# Altium PCB Therm_Expand_PCB.PcbDoc (part 1 of 2)
Units mm, origin at the board's own origin, x right, y up, seen from the top; angles counter-clockwise.
Board outline 84.45 x 65.96 mm, 2 copper layers (Top Layer, Bottom Layer); 40 components, 59 nets, 217 pads, 138 vias.
Unrouted connection lines stored in the file: 1.
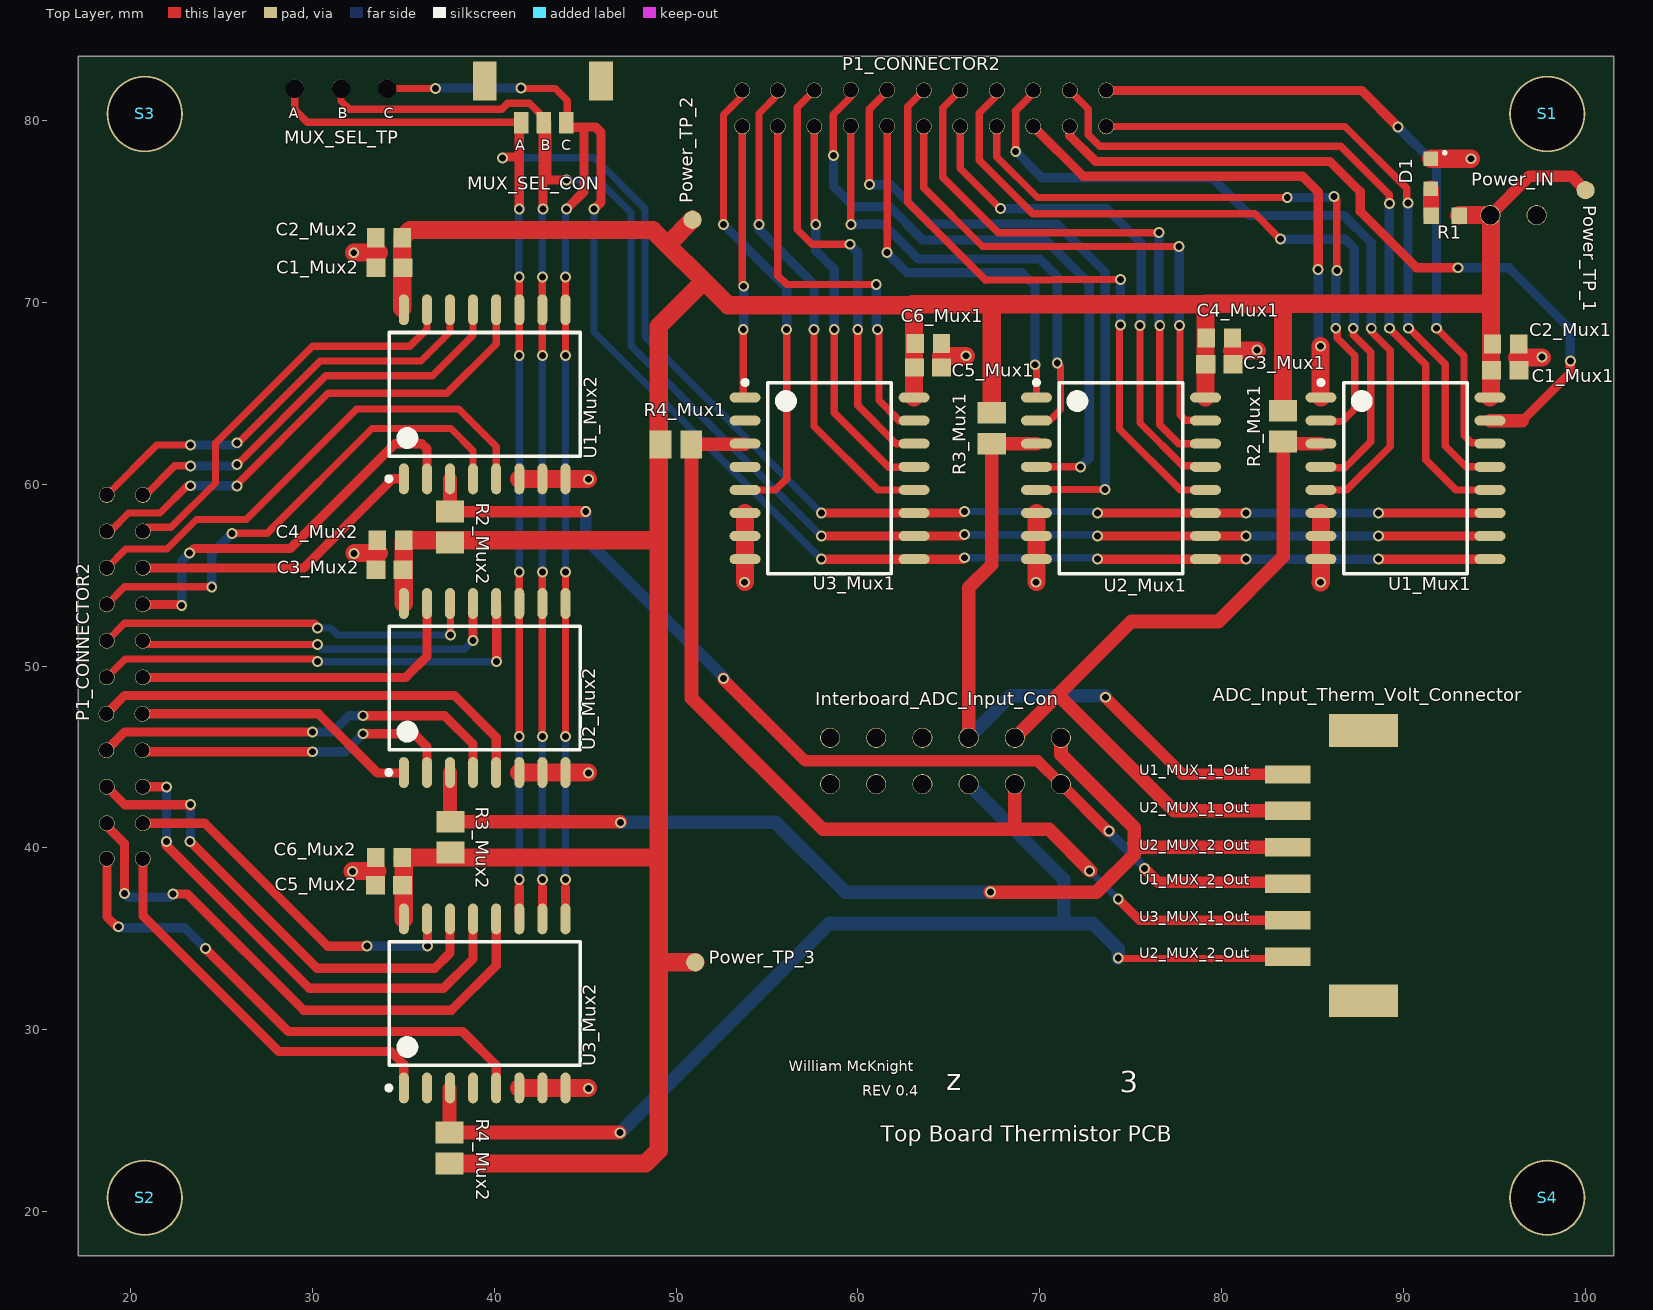
[diagram p0: Top Layer view]
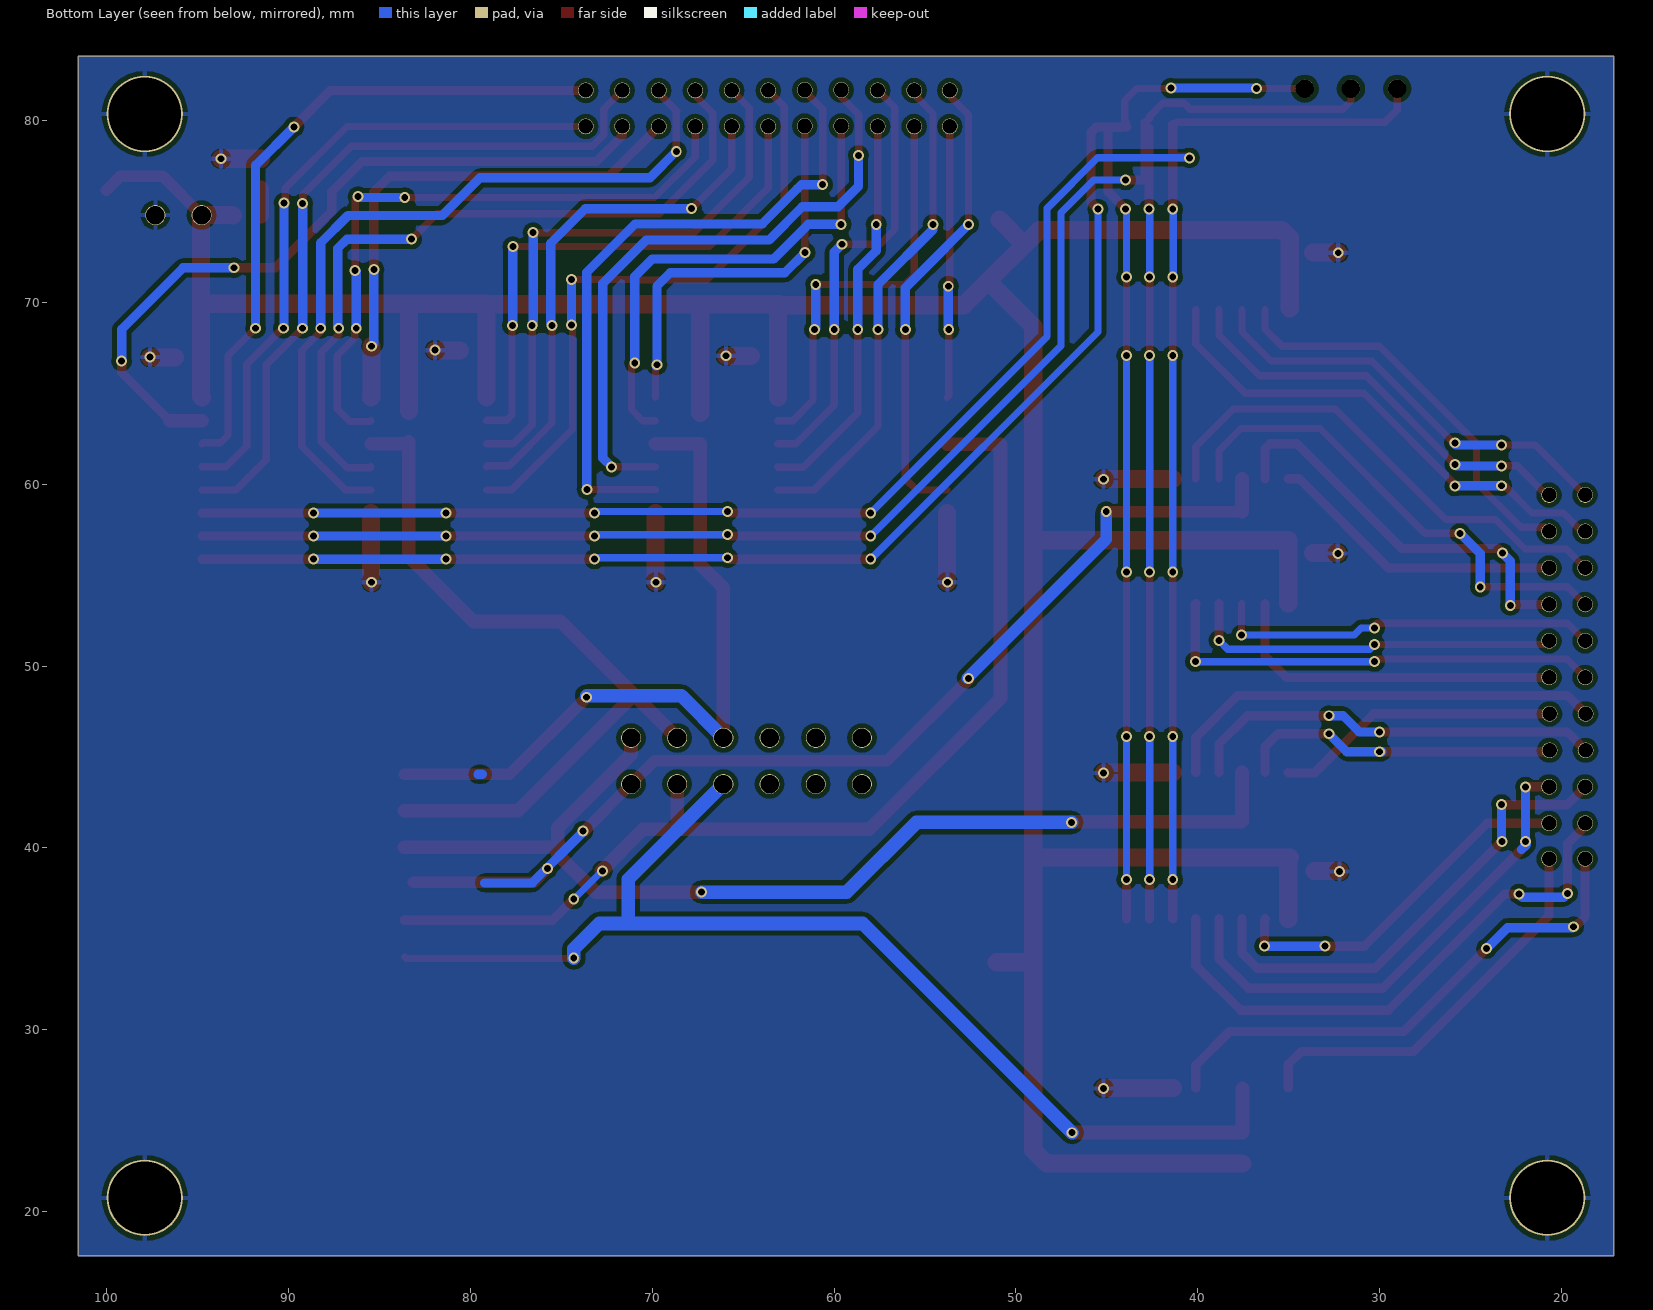
[diagram p1: Bottom Layer view, seen from below]

## Layer stack, top to bottom
Top Solder: solder mask 0.0102, Solder Resist, Dk 3.5
Top Layer: signal copper 0.0356
Dielectric 1: dielectric 0.32, FR-4, Dk 4.8
Bottom Layer: signal copper 0.0356
Bottom Solder: solder mask 0.0102, Solder Resist, Dk 3.5

## Board outline
17.12,83.541 101.575,83.541 101.575,17.577 17.12,17.577

## Design rules (kind name [scope] priority, off if disabled: settings)
Clearance [All] p1: gap=0.254 ignorepadtopadclearanceinfootprint=FALSE except(0: Arc-Hole Track-Hole SMDPad-Hole THPad-Hole Via-Hole Fill-Hole Poly-Hole Region-Hole Text-Hole; 0.127: Arc-Arc Arc-Track Arc-Via Track-Track Track-Via SMDPad-SMDPad)
HoleSize [All] p1: absolutevalues=TRUE maxlimit=6.3 minlimit=0.2 maxpercent=80.000 minpercent=20.000
MinimumAnnularRing [All] p1: minimumring=0.3
PolygonConnect [All] p1: connectstyle=Relief reliefconductorwidth=0.254 reliefentries=4 polygonreliefangle="90 Angle" airgapwidth=0.254
RoutingVias [All] p1: holewidth=0.381 width=0.65 viastyle="Through Hole" minholewidth=0.305 minwidth=0.6 maxholewidth=0.711 maxwidth=0.9
ShortCircuit [All] p1: allowed=TRUE
SolderMaskExpansion [All] p1: expansion=0.102
Width [All] p1: maxlimit=7.62 minlimit=0.127 preferedwidth=0.381 minimp=50.000000 maximp=50.000000 favimp=50.000000
28 further rules are at their usual default settings.

## Classes and differential pairs
component class U_Single_Mux2: C1_Mux2 C2_Mux2 C3_Mux2 C4_Mux2 MUX_SEL_TP R4_Mux2 U1_Mux2
component class U_Single_Mux1: C1_Mux1 C2_Mux1 C3_Mux1 C4_Mux1 Power_TP_2 Power_TP_3 R3_Mux1 R4_Mux1 U1_Mux1 U2_Mux1
component class U_AHK50H-ND_THERM_CONNECTOR2: P1_CONNECTOR2
component class U_AHK50H-ND_THERM_CONNECTOR1: P1_CONNECTOR2
component class U_Data_Conversion: D1 Interboard_ADC_Input_Con Power_IN Power_TP_1 R1 S1 S2 S4 "SPI Connector"
net class ADC_OUTA[1..2]: ADC_OUTA1 ADC_OUTA2
channel class 50Pin_Connector: Data_TransferA_U_AHK50H-ND_THERM_CONNECTOR1 Data_TransferB_U_AHK50H-ND_THERM_CONNECTOR2
channel class MID: Data_Transfer1 Data_Transfer2
channel class Multiplexers: Data_TransferA_U_Single_Mux1 Data_TransferB_U_Single_Mux2
net class ADC_OUTB[1..2]: ADC_OUTB1 ADC_OUTB2
net class ADC_OUTC[1..2]: ADC_OUTC1 ADC_OUTC2

## Components (designator, comment, footprint, x,y, rotation, side; value= is the part's Value field where it differs from the comment)
ADC_Input_Therm_Volt_Connector "6Pos_ADC_Volt_Test_Connector" 6POS_ADC_Volt_TEST 83.642,34.011 r90 top (schematic designator P4)
C1_Mux1 "0.1uF" "0.1uF Bypass Capacitor" 95.606,66.269 r180 top (schematic designator C1)
C1_Mux2 "0.1uF" "0.1uF Bypass Capacitor" 34.239,71.907 r0 top (schematic designator C1)
C2_Mux1 "1uF" 1UF_SAMSUNG 95.631,67.716 r180 top (schematic designator C2)
C2_Mux2 "1uF" 1UF_SAMSUNG 34.214,73.558 r0 top (schematic designator C2)
C3_Mux1 "0.1uF" "0.1uF Bypass Capacitor" 79.883,66.599 r180 top (schematic designator C3)
C3_Mux2 "0.1uF" "0.1uF Bypass Capacitor" 34.239,55.296 r0 top (schematic designator C3)
C4_Mux1 "1uF" 1UF_SAMSUNG 79.883,68.047 r180 top (schematic designator C4)
C4_Mux2 "1uF" 1UF_SAMSUNG 34.29,56.921 r0 top (schematic designator C4)
C5_Mux1 "0.1uF" "0.1uF Bypass Capacitor" 63.856,66.421 r180 top (schematic designator C5)
C5_Mux2 "0.1uF" "0.1uF Bypass Capacitor" 34.214,37.948 r0 top (schematic designator C5)
C6_Mux1 "1uF" 1UF_SAMSUNG 63.881,67.742 r180 top (schematic designator C6)
C6_Mux2 "1uF" 1UF_SAMSUNG 34.214,39.472 r0 top (schematic designator C6)
D1 "LED" Green_SMD_LED 93.142,86.69 r270 top
Interboard_ADC_Input_Con "12 POS ADC Header" "12 POS Dual Header" 58.471,43.51 r0 top (schematic designator P2)
MUX_SEL_CON "3_POS_MEX_SEL" 3POS_MUX_SEL 43.967,79.883 r180 top (schematic designator P6)
MUX_SEL_TP "3 POS Mux Select Header" "Mux Select 3 Pos Header Pin" 34.112,81.763 r180 top (schematic designator P5)
P1_CONNECTOR2 "22-Pin-Connector" "22-PIN CONENCTOR" 363.169,390.042 r90 top (schematic designator P1)
P1_CONNECTOR2 "22-Pin-Connector" "22-PIN CONENCTOR" 404.292,-262.814 r0 top (schematic designator P1)
Power_IN "2 Pos Power Header without 3D body" "2 Pos Power Header - duplicate" 94.793,74.803 r0 top (schematic designator P3)
Power_TP_1 "Test Point" "Test Point" 100.025,76.175 r90 top (schematic designator TP1)
Power_TP_2 "Test Point" "Test Point" 50.902,74.549 r90 top (schematic designator TP2)
Power_TP_3 "Test Point" "Test Point" 51.054,33.706 r90 top (schematic designator TP4)
R1 "Green" Green_LED_Resistor_90.9 92.304,74.778 r0 top
R2_Mux1 "6.49kOhm SMD Resistor" RESC2012X06N 83.388,63.195 r90 top (schematic designator R2)
R2_Mux2 "6.49kOhm SMD Resistor" RESC2012X06N 37.567,57.646 r270 top (schematic designator R2)
R3_Mux1 "6.49kOhm SMD Resistor" RESC2012X06N 67.361,63.082 r90 top (schematic designator R3)
R3_Mux2 "6.49kOhm SMD Resistor" RESC2012X06N 37.592,40.589 r270 top (schematic designator R3)
R4_Mux1 "6.49kOhm SMD Resistor" RESC2012X06N 49.987,62.179 r180 top (schematic designator R4)
R4_Mux2 "6.49kOhm SMD Resistor" RESC2012X06N 37.541,23.495 r270 top (schematic designator R4)
S1 "#6-32 Standoff" "#6-32 Stand Off"#1 108.179,111.023 r0 top
S2 "#6-32 Standoff" "#6-32 Stand Off"#2 31.039,51.41 r0 top
S3 "#6-32 Standoff" "#6-32 Stand Off"#3 31.039,111.023 r0 top
S4 "#6-32 Standoff" "#6-32 Stand Off"#4 108.179,51.41 r0 top
U1_Mux1 "8:1 - MUX" "8x1 16SOIC MUX" 90.119,60.325 r0 top (schematic designator U1)
U1_Mux2 "8:1 - MUX" "8x1 16SOIC MUX" 39.472,64.948 r90 top (schematic designator U1)
U2_Mux1 "8:1 - MUX" "8x1 16SOIC MUX" 74.473,60.325 r0 top (schematic designator U2)
U2_Mux2 "8:1 - MUX" "8x1 16SOIC MUX" 39.472,48.793 r90 top (schematic designator U2)
U3_Mux1 "8:1 - MUX" "8x1 16SOIC MUX" 58.445,60.325 r0 top (schematic designator U3)
U3_Mux2 "8:1 - MUX" "8x1 16SOIC MUX" 39.472,31.445 r90 top (schematic designator U3)

## Footprints (in the part's own frame and the unit in brackets; to place one, negate y for a bottom-side part, rotate by r counter-clockwise, add the part's x,y. Pads: shape width x height; smd on the part's side, far side on the other; paste and mask are expansions set on the pad)
"0.1uF Bypass Capacitor" [mm] "Chip Capacitor, 2-Leads, Body 1.60x0.80mm, IPC Medium Density"
  rect 1.05x1 smd: 1(-0.75,0) 2(0.75,0)
  body extent -0.87,-0.48 0.87,0.48, height 0.9
1UF_SAMSUNG [mm]
  rect 0.95x1.05 smd: 1(-0.725,0) 2(0.725,0)
  body extent -0.85,-0.45 0.85,0.45, height 0.9
"2 Pos Power Header - duplicate" [mm] "Without 3D body,"
  round 1.1 hole 1.02: 1(0,0) 2(2.54,0)
3POS_MUX_SEL [mm] "CONN HEADER SMD R/A 3POS 1.25MM"
  rect 0.8x1.2 smd: 1(0,0) 2(1.245,0) 3(2.489,0)
  rect 1.3x2.15 smd: 4(-1.905,-2.286) 5(4.496,-2.286)
  body extent -2.28,-3.84 4.72,0.36, height 3.91
6POS_ADC_Volt_TEST [mm] "CONN HEADER SMD R/A 6POS 2MM"
  rect 1x2.5 smd: 1(0,0) 2(2.007,0) 3(4.013,0) 4(6.02,0) 5(8.026,0) 6(10.033,0)
  rect 1.8x3.8 smd: 7(-2.413,-4.166) 8(12.446,-4.166)
"8x1 16SOIC MUX" [mm] "IC MUX/DEMUX 8X1 16SOIC"
  oval 1.7x0.55 smd: 1(-4.65,4.445) 2(-4.65,3.175) 3(-4.65,1.905) 4(-4.65,0.635) 5(-4.65,-0.635) 6(-4.65,-1.905) 7(-4.65,-3.175) 8(-4.65,-4.445) 9(4.65,-4.445) 10(4.65,-3.175) 11(4.65,-1.905) 12(4.65,-0.635) 13(4.65,0.635) 14(4.65,1.905) 15(4.65,3.175) 16(4.65,4.445)
  silkscreen extent -4.77,-5.25 3.4,5.39, body extent -5.15,-5.25 5.15,5.25, height 2.65
"12 POS Dual Header" [mm] "Board to Board ADC Channel Header"
  round 1.1 hole 1.02: 1(0,0) 2(0,2.54) 3(2.54,2.54) 4(2.54,0) 5(5.08,0) 6(5.08,2.54) 7(7.62,2.54) 8(7.62,0) 9(10.16,0) 10(10.16,2.54) 11(12.7,2.54) 12(12.7,0)
  body extent -1.27,-3.18 13.97,4.7, height 20.46
"22-PIN CONENCTOR" [mil]
  round 34 hole 31.5: 1(-13017,13484) 2(-13017,13562) 3(-13096,13484) 4(-13096,13562) 5(-13175,13484) 6(-13175,13562) 7(-13254,13484) 8(-13254,13562) 9(-13333,13484) 10(-13333,13562) 11(-13412,13484) 12(-13412,13562) 13(-13491,13485) 14(-13491,13563) 15(-13570,13485) 16(-13570,13563) 17(-13649,13484) 18(-13649,13562) 19(-13728,13484) 20(-13728,13562) 21(-13805,13484) 22(-13805,13562)
  body extent -13883,13472 -12939,13866, height 199
"#6-32 Stand Off"#1 [mm]
  round 4.2 hole 4: S1(-10.262,-30.658)
  body extent -13.92,-33.83 -6.6,-27.48, height 10.32
"#6-32 Stand Off"#2 [mm]
  round 4.2 hole 4: S3(-10.262,-30.658)
  body extent -13.92,-33.83 -6.6,-27.48, height 10.32
"#6-32 Stand Off"#3 [mm]
  round 4.2 hole 4: S2(-10.262,-30.658)
  body extent -13.92,-33.83 -6.6,-27.48, height 10.32
"#6-32 Stand Off"#4 [mm]
  round 4.2 hole 4: S4(-10.262,-30.658)
  body extent -13.92,-33.83 -6.6,-27.48, height 10.32
Green_LED_Resistor_90.9 [mm]
  rect 0.85x0.9 smd: 1(-0.775,0) 2(0.775,0)
  body extent -0.85,-0.45 0.85,0.45, height 0.55
Green_SMD_LED [mm]
  rect 0.8x0.8 smd: 1(8.788,-1.626) 2(10.439,-1.626)
  silkscreen extent 8.43,-0.89 8.48,-0.84, body extent 8.79,-2.02 10.41,-1.23, height 0.71
"Mux Select 3 Pos Header Pin" [mm]
  round 1 hole 1.02: 1(0,0) 2(2.54,0) 3(5.08,0)
  body extent -1.19,-7.26 6.43,1.24, height 5.77
RESC2012X06N [mm] "Chip Resistor, 2-Leads, Body 2.00x1.25mm, IPC Medium Density"
  rect 1.2x1.55 smd: 1(-0.85,0) 2(0.85,0)
  body extent -1.1,-0.58 1.1,0.58, height 0.6
"Test Point" [mm]
  round 1 smd: 1(0,0)

## Part data
ADC_Input_Therm_Volt_Connector: "Connector Header Surface Mount, Right Angle 6 position 0.079\" (2.00mm)", Manufacturer=Molex, Manufacturer Part Number=5055780671, Supplier Part Number 1=WM17945CT-ND, Pricing 1="1=1.02000, 10=0.89300, 100=0.77050 (USD)", RoHS=No, Stock 1=3435, Supplier 1=Digi-Key
C1_Mux1 C1_Mux2 C3_Mux1 C3_Mux2 C5_Mux1 C5_Mux2: library part "0.1uF Cap", "0.1uF Bypass Cap", Case/Package=0603, Case Code (Metric)=1608, Dielectric=X7R, Dielectric Material=Ceramic, Manufacturer=KEMET, Manufacturer Part Number=C0603C104K9RACTU, Max Operating Temperature=125°C, Min Operating Temperature=-55°C, Package Quantity=4000, Supplier Part Number 1=399-15351-1-ND, Tolerance=10%, Voltage Rating=6.3V, Case Code (Imperial)=0603, ComponentLink1Description=https://datasheet.ciiva.com/13371/kem-c1002-x7r-smd-357932-13371879.pdf?src-supplier=Mouser, ComponentLink1URL=https://datasheet.ciiva.com/13371/kem-c1002-x7r-smd-357932-13371879.pdf?src-supplier=Mouser, Dissipation Factor=5%, Height=0.8mm, Length=1.6mm, Mount="Surface Mount", Packaging="Tape and Reel", Pricing 1="1=0.19000, 10=0.13800, 100=0.06480, 500=0.04546, 1000=0.03763 (USD)", RoHS=Yes, Stock 1=758, Supplier 1=Digi-Key, Termination=SMD/SMT, Thickness=0.034inch, Voltage Rating (DC)=6.3V, Width=0.8mm
C2_Mux1 C2_Mux2 C4_Mux1 C4_Mux2 C6_Mux1 C6_Mux2: library part "1uF Samsung Cap", "1uF Samsung Cap", Case/Package=0603, Case Code (Metric)=1608, Dielectric=X7R, Manufacturer=Samsung, Manufacturer Part Number=CL10B105KP8NNNC, Max Operating Temperature=125°C, Min Operating Temperature=-55°C, Package Quantity=1, Supplier Part Number 1=1276-1946-1-ND, Tolerance=10%, Voltage Rating=10V, Capacitance=1uF, Case Code (Imperial)=0603, ComponentLink1Description=https://media.digikey.com/pdf/Data%20Sheets/Samsung%20PDFs/CL_Series_MLCC_ds.pdf?src-supplier=Digi-Key, ComponentLink1URL=https://media.digikey.com/pdf/Data%20Sheets/Samsung%20PDFs/CL_Series_MLCC_ds.pdf?src-supplier=Digi-Key, ComponentLink2Description=http://www1.futureelectronics.com/doc/SAMSUNG/CL10B105KP8NNNC.pdf?src-supplier=Future+Electronics, ComponentLink2URL=http://www1.futureelectronics.com/doc/SAMSUNG/CL10B105KP8NNNC.pdf?src-supplier=Future+Electronics, ComponentLink3Description=https://www.verical.com/server-webapp/html/getDatasheet?partID=358410&src-supplier=Verical, ComponentLink3URL=https://www.verical.com/server-webapp/html/getDatasheet?partID=358410&src-supplier=Verical, Contact Plating=Tin, Depth=0.8mm, Height=0.8mm, Lead Free="Lead Free", Length=1.6mm, Mount="Surface Mount", Packaging="Tape and Reel", Pricing 1="1=0.1, 10=0.052, 100=0.0233, 500=0.0166, 1000=0.0131 (USD)", Radiation Hardening=No, Stock 1=10781730, Supplier 1=Digi-Key, Thickness=0.035inch, Voltage Rating (DC)=10V, Width=0.031inch
D1: library part GREEN_LED, Case/Package=0603, Case Code (Metric)=1608, Color=Green, Forward Current=20mA, Forward Voltage=2V, Lens Color=Colorless,Clear, Manufacturer=Dialight, Manufacturer Part Number=5988070107F, Max Operating Temperature=100°C, Min Operating Temperature=-30°C, Package Quantity=4000, Power Dissipation=60mW, Reverse Voltage=5V, Supplier Part Number 1=350-2035-1-ND, Case Code (Imperial)=0603, ComponentLink1Description=http://www.mouser.com/ds/2/109/SMT_selector_guide-267443.pdf?src-supplier=Mouser, ComponentLink1URL=http://www.mouser.com/ds/2/109/SMT_selector_guide-267443.pdf?src-supplier=Mouser, ComponentLink2Description=http://uk.rs-online.com/webdocs/0ae2/0900766b80ae2975.pdf?src-supplier=RSComponents, ComponentLink2URL=http://uk.rs-online.com/webdocs/0ae2/0900766b80ae2975.pdf?src-supplier=RSComponents, ComponentLink3Description=http://www.farnell.com/datasheets/1720200.pdf?src-supplier=Element14, ComponentLink3URL=http://www.farnell.com/datasheets/1720200.pdf?src-supplier=Element14, ComponentLink4Description=https://media.digikey.com/pdf/Data%20Sheets/Dialight%20PDFs/598_Series_0603_Pkg.pdf?src-supplier=Digi-Key, ComponentLink4URL=https://media.digikey.com/pdf/Data%20Sheets/Dialight%20PDFs/598_Series_0603_Pkg.pdf?src-supplier=Digi-Key, ComponentLink5Description=http://www.farnell.com/datasheets/1484480.pdf?src-supplier=Element14, ComponentLink5URL=http://www.farnell.com/datasheets/1484480.pdf?src-supplier=Element14, ComponentLink6Description=https://www.alliedelec.com/m/d/745256ca487aea7b70ea31e2d673d5bb.pdf?src-supplier=Allied+Electronics, ComponentLink6URL=https://www.alliedelec.com/m/d/745256ca487aea7b70ea31e2d673d5bb.pdf?src-supplier=Allied+Electronics, ComponentLink7Description=http://www.onlinecomponents.com/productFiles/mf-DIA/mdei5980603.pdf?src-supplier=Onlinecomponents.com, ComponentLink7URL=http://www.onlinecomponents.com/productFiles/mf-DIA/mdei5980603.pdf?src-supplier=Onlinecomponents.com, ComponentLink8Description=https://www.verical.com/server-webapp/html/getDatasheet?partID=146438&src-supplier=Verical, ComponentLink8URL=https://www.verical.com/server-webapp/html/getDatasheet?partID=146438&src-supplier=Verical, ComponentLink9Description=http://www.dialight.com/Assets/Brochures_And_Catalogs/Indication/SMT_selector_guide.pdf?src-supplier=Future+Electronics, ComponentLink9URL=http://www.dialight.com/Assets/Brochures_And_Catalogs/Indication/SMT_selector_guide.pdf?src-supplier=Future+Electronics, Depth=0.8mm, Dominant Wavelength=568nm, Height=0.7mm, Illumination Color=Green, Lead Free="Lead Free", Length=1.6mm, Lens Size=0.8mm, Lens Style=Flat,Rectangular,Diffused,Colorless,Clear, Lens Transparency=Clear, Luminous Intensity=20mcd, Mount="Surface Mount", Number of Elements=1, Number of LEDs=1, Number of Pins=2, Packaging="Tape and Reel", Pricing 1="1=0.46, 10=0.33, 25=0.2528, 100=0.1648, 250=0.1209, 500=0.1026, 1000=0.0843 (USD)", Radiation Hardening=No, REACH SVHC="No SVHC", Stock 1=228546, Supplier 1=Digi-Key, Test Current=20mA, Viewing Angle=140°, Wavelength=570nm, Width=0.8mm
Interboard_ADC_Input_Con: "Interboard connector for thermistors connecting to ADC", Color=Black, Manufacturer=3M, Manufacturer Part Number=929715-06-06-EU, Package Quantity=500, Supplier Part Number 1=3M156375-12-ND, ComponentLink1Description=http://www.mouser.com/ds/2/1/ts0769-35914.pdf?src-supplier=Mouser, ComponentLink1URL=http://www.mouser.com/ds/2/1/ts0769-35914.pdf?src-supplier=Mouser, ComponentLink2Description=http://components.arrow.com/part/dataview/42715320S8912076N3321?src-supplier=Arrow, ComponentLink2URL=http://components.arrow.com/part/dataview/42715320S8912076N3321?src-supplier=Arrow, ComponentLink3Description=http://multimedia.3m.com/mws/mediawebserver?66666UuZjcFSLXTtmXME5x46EVuQEcuZgVs6EVs6E666666--?src-supplier=Digi-Key, ComponentLink3URL=http://multimedia.3m.com/mws/mediawebserver?66666UuZjcFSLXTtmXME5x46EVuQEcuZgVs6EVs6E666666--?src-supplier=Digi-Key, Connector Type="Male Pin", Contact Mating Length=0.318inch, Contact Plating=Gold, Gender=Male, Mount="Through Hole", Number of Positions=12, Number of Rows=2, Packaging=Bulk, Pitch=0.1inch, Pricing 1="1=1.86000, 10=1.69000, 25=1.58600, 50=1.51720, 100=1.44820, 250=1.31024, 500=1.20680 (USD)", RoHS=Yes, Row Spacing=0.1inch, Stock 1=0, Supplier 1=Digi-Key, Termination=Solder
MUX_SEL_CON: "Connector Header Surface Mount, Right Angle 3 position 0.049\" (1.25mm)", Flammability Rating="UL94 V-0", Insulation Color=Black, Manufacturer=Molex, Manufacturer Part Number=505567-0371, Max Operating Temperature=105°C, Min Operating Temperature=-40°C, Supplier Part Number 1=WM17039CT-ND, ComponentLink1Description=https://www.molex.com/pdm_docs/sd/5055670371_sd.pdf?src-supplier=Digi-Key, ComponentLink1URL=https://www.molex.com/pdm_docs/sd/5055670371_sd.pdf?src-supplier=Digi-Key, ComponentLink2Description=http://www.farnell.com/datasheets/2551041.pdf?src-supplier=Newark, ComponentLink2URL=http://www.farnell.com/datasheets/2551041.pdf?src-supplier=Newark, Connector Type="Header,Male Pin", Contact Material=Brass, Contact Plating=Tin, Contact Shape=Square, Fastening Type=Ramp, Insulation Material=Nylon, Mount="Surface Mount", Number of Positions=3, Number of Rows=1, Packaging="Cut Tape", Pricing 1="1=0.84000, 10=0.74100, 100=0.63940, 500=0.52312 (USD)", RoHS=No, Stock 1=2041, Supplier 1=Digi-Key, Termination=Solder
MUX_SEL_TP: "Mux Sel Header TP", Manufacturer="Adam Equipment", Manufacturer Part Number=PH1RA-03-UA, Supplier Part Number 1=2057-PH1RA-03-UA-ND, ComponentLink1Description=https://datasheet.ciiva.com/16476/page-292-295-16476086.pdf?src-supplier=Future+Electronics, ComponentLink1URL=https://datasheet.ciiva.com/16476/page-292-295-16476086.pdf?src-supplier=Future+Electronics, Lead Free="Lead Free", Pricing 1="1=0.12000, 10=0.11300, 100=0.06960, 500=0.05760, 1000=0.05040, 5000=0.04320, 10000=0.04200 (USD)", RoHS=Yes, Stock 1=4630, Supplier 1=Digi-Key
P1_CONNECTOR2 P1_CONNECTOR2: Color=Black, Contact Resistance=30mR, Current Rating=2A, Manufacturer=Hirose, Manufacturer Part Number=DF11-22DP-2DS(24), Max Operating Temperature=85°C, Min Operating Temperature=-30°C, Package Quantity=20, Supplier Part Number 1=H10253-ND, Voltage Rating=250V, ComponentLink1Description=http://docs-usa.electrocomponents.com/techlib:/itc_doclist_US.htm?stockno=6888963&src-supplier=Allied+Electronics, ComponentLink1URL=http://docs-usa.electrocomponents.com/techlib:/itc_doclist_US.htm?stockno=6888963&src-supplier=Allied+Electronics, ComponentLink2Description=https://www.verical.com/server-webapp/html/getDatasheet?partID=456315&src-supplier=Verical, ComponentLink2URL=https://www.verical.com/server-webapp/html/getDatasheet?partID=456315&src-supplier=Verical, ComponentLink3Description=http://www.hirose.co.jp/cataloge_hp/en_DF11_20130411.pdf?src-supplier=Future+Electronics, ComponentLink3URL=http://www.hirose.co.jp/cataloge_hp/en_DF11_20130411.pdf?src-supplier=Future+Electronics, ComponentLink4Description=http://www.farnell.com/datasheets/91550.pdf?src-supplier=Element14, ComponentLink4URL=http://www.farnell.com/datasheets/91550.pdf?src-supplier=Element14, ComponentLink5Description=http://www.mouser.com/ds/2/185/DF11_catalog-1064296.pdf?src-supplier=Mouser, ComponentLink5URL=http://www.mouser.com/ds/2/185/DF11_catalog-1064296.pdf?src-supplier=Mouser, ComponentLink6Description=http://documents.rs-components.com/techlib://itc_doclist_GB.htm?stockno=6056598&src-supplier=RSComponents, ComponentLink6URL=http://documents.rs-components.com/techlib://itc_doclist_GB.htm?stockno=6056598&src-supplier=RSComponents, Connector Type="Male Pin", Contact Material="Brass,Copper Alloy,Tin", Contact Mating Length=0.118inch, Contact Plating=Tin, Depth=10mm, Fastening Type=Detent, Gender=Male, Height=5mm, Housing Color=Black, Housing Material=Polyamide, Lead Free="Lead Free", Length=24mm, Max Current Rating=2A, Mount="Through Hole", Number of Contacts=22, Number of Positions=22, Number of Rows=2, Orientation="Right Angle", Packaging=Rail/Tube, Pitch=2mm, Pricing 1="1=1.19, 20=1.0455, 100=0.902, 500=0.738, 1000=0.656 (USD)", Radiation Hardening=No, Row Spacing=0.079inch, Stock 1=536, Supplier 1=Digi-Key, System=Connector, Termination=Solder
Power_IN: "No supplier part for this schematic symbol, only here to create board to board holes for the power header"
R1: library part Green_LED_Res, Case/Package=0201, Case Code (Metric)=0603, Manufacturer=Panasonic, Manufacturer Part Number=ERJ-1GNF90R9C, Max Operating Temperature=125°C, Max Power Dissipation=50mW, Min Operating Temperature=-55°C, Package Quantity=15000, Resistance=90.9R, Supplier Part Number 1=311-90.9HRCT-ND, Temperature Coefficient=200ppm/°C, Tolerance=1%, Voltage Rating=25V, Voltage Rating (DC)=50V, Case Code (Imperial)=0201, ComponentLink1Description=https://datasheet.ciiva.com/15189/getdatasheetpartid-326528-15189836.pdf?src-supplier=Verical, ComponentLink1URL=https://datasheet.ciiva.com/15189/getdatasheetpartid-326528-15189836.pdf?src-supplier=Verical, ComponentLink2Description=https://datasheet.ciiva.com/12558/rc0603-272842-12558285.pdf?src-supplier=Mouser, ComponentLink2URL=https://datasheet.ciiva.com/12558/rc0603-272842-12558285.pdf?src-supplier=Mouser, Composition="Thick Film", Contact Plating=Tin,Matte, Depth=0.8mm, Height=0.01inch, Lead Free="Lead Free", Length=0.024inch, Military Standard=Not, Mount="Surface Mount", Number of Terminations=2, Packaging="Tape and Reel", Power Rating=50mW, Pricing 1="1=0.10000, 10=0.02400, 100=0.00970, 1000=0.00437, 2500=0.00379 (USD)", Radiation Hardening=No, RoHS=Yes, Stock 1=401780, Supplier 1=Digi-Key, Termination=SMD/SMT, Width=0.3mm
R2_Mux1 R2_Mux2 R3_Mux1 R3_Mux2 R4_Mux1 R4_Mux2: Case/Package=0805, Case Code (Metric)=2012, Manufacturer=Panasonic, Manufacturer Part Number=ERA6AEB6491V, Max Operating Temperature=155°C, Max Power Dissipation=125mW, Min Operating Temperature=-55°C, Package Quantity=1, Resistance=6.49K, Supplier Part Number 1=P6.49KDACT-ND, Temperature Coefficient=25ppm/°C, Tolerance=0.1%, Voltage Rating=100V, Case Code (Imperial)=0805, ComponentLink1Description=http://www.farnell.com/datasheets/485442.pdf?src-supplier=Farnell, ComponentLink1URL=http://www.farnell.com/datasheets/485442.pdf?src-supplier=Farnell, ComponentLink2Description=http://www.mouser.com/ds/2/315/AOA0000CE26-32660.pdf?src-supplier=Mouser, ComponentLink2URL=http://www.mouser.com/ds/2/315/AOA0000CE26-32660.pdf?src-supplier=Mouser, ComponentLink3Description=http://www.farnell.com/datasheets/2059650.pdf?src-supplier=Farnell, ComponentLink3URL=http://www.farnell.com/datasheets/2059650.pdf?src-supplier=Farnell, ComponentLink4Description=http://uk.rs-online.com/webdocs/0eb1/0900766b80eb1d8c.pdf?src-supplier=RSComponents, ComponentLink4URL=http://uk.rs-online.com/webdocs/0eb1/0900766b80eb1d8c.pdf?src-supplier=RSComponents, ComponentLink5Description=http://www.farnell.com/datasheets/485442.pdf?src-supplier=Element14, ComponentLink5URL=http://www.farnell.com/datasheets/485442.pdf?src-supplier=Element14, ComponentLink6Description=http://www.produktinfo.conrad.com/datenblaetter/1100000-1199999/001181295-da-01-en-WIDERSTAND_ERA_0805_6K49_0_1__5000ST.pdf?src-supplier=Conrad, ComponentLink6URL=http://www.produktinfo.conrad.com/datenblaetter/1100000-1199999/001181295-da-01-en-WIDERSTAND_ERA_0805_6K49_0_1__5000ST.pdf?src-supplier=Conrad, Composition="Thin Film,Metal Film", Contact Plating=Tin, Depth=1.25mm, Features="Automotive AEC-Q200", Height=0.5mm, Lead Free="Lead Free", Length=2mm, Military Standard=Not, Mount="Surface Mount", Number of Pins=2, Number of Terminations=2, Packaging="Tape and Reel", Power Rating=125mW, Pricing 1="1=0.36, 10=0.302, 100=0.1182, 1000=0.0495, 2500=0.0454 (USD)", Radiation Hardening=No, REACH SVHC="No SVHC", Stock 1=15147, Supplier 1=Digi-Key, Termination=SMD/SMT, Voltage Rating (DC)=100V, Width=1.25mm
S1 S2 S3 S4: "Hex Standoff for Thermistor Boards", Manufacturer=RAF, Manufacturer Part Number=2102T-632-AL-7, Package Quantity=100, Supplier Part Number 1=1772-1144-ND, Pricing 1="1=0.5, 25=0.3328, 100=0.2834, 250=0.2692, 500=0.2551, 1000=0.2409 (USD)", Stock 1=1687, Supplier 1=Digi-Key
U1_Mux1 U1_Mux2 U2_Mux1 U2_Mux2 U3_Mux1 U3_Mux2: "Current Therm 8:1 Mux", Case/Package=TSSOP, High Level Output Current=25mA, Manufacturer="Texas Instruments", Manufacturer Part Number=SN74LV4051ATPWRQ1, Max Operating Temperature=105°C, Max Supply Voltage=5.5V, Min Operating Temperature=-40°C, Min Supply Voltage=2V, On-State Resistance=75R, Operating Supply Current=20uA, Package Quantity=1, Supplier Part Number 1=296-37427-1-ND, -3db Bandwidth=35MHz, Bandwidth=35MHz, ComponentLink1Description=http://www.ti.com/lit/ds/symlink/sn74lv4051a-q1.pdf?src-supplier=Digi-Key, ComponentLink1URL=http://www.ti.com/lit/ds/symlink/sn74lv4051a-q1.pdf?src-supplier=Digi-Key, ComponentLink2Description=http://www.ti.com/lit/gpn/sn74lv4051a-q1?src-supplier=Mouser, ComponentLink2URL=http://www.ti.com/lit/gpn/sn74lv4051a-q1?src-supplier=Mouser, ComponentLink3Description=https://www.verical.com/server-webapp/html/getDatasheet?partID=137249&src-supplier=Verical, ComponentLink3URL=https://www.verical.com/server-webapp/html/getDatasheet?partID=137249&src-supplier=Verical, ComponentLink4Description=http://focus.ti.com/lit/ds/symlink/sn74lv4051a-q1.pdf?src-supplier=Avnet, ComponentLink4URL=http://focus.ti.com/lit/ds/symlink/sn74lv4051a-q1.pdf?src-supplier=Avnet, ComponentLink5Description=http://www.produktinfo.conrad.com/datenblaetter/1100000-1199999/001187277-da-01-en-IC_MUX_DE_SN74LV4051ATPWRQ1_TSSOP_16_TID.pdf?src-supplier=Conrad, ComponentLink5URL=http://www.produktinfo.conrad.com/datenblaetter/1100000-1199999/001187277-da-01-en-IC_MUX_DE_SN74LV4051ATPWRQ1_TSSOP_16_TID.pdf?src-supplier=Conrad, ComponentLink6Description=https://datasheet.ciiva.com/15127/getdatasheetpartid-348177-15127781.pdf?src-supplier=Verical, ComponentLink6URL=https://datasheet.ciiva.com/15127/getdatasheetpartid-348177-15127781.pdf?src-supplier=Verical, ComponentLink7Description=https://datasheet.ciiva.com/14435/sn74lv4051a-q1-14435640.pdf?src-supplier=Avnet, ComponentLink7URL=https://datasheet.ciiva.com/14435/sn74lv4051a-q1-14435640.pdf?src-supplier=Avnet, ComponentLink8Description=https://datasheet.ciiva.com/29645/sn74lv4051a-q1-29645693.pdf?src-supplier=Digi-Key, ComponentLink8URL=https://datasheet.ciiva.com/29645/sn74lv4051a-q1-29645693.pdf?src-supplier=Digi-Key, ComponentLink9Description=https://datasheet.ciiva.com/29645/sn74lv4051a-q1-29645694.pdf?src-supplier=Digi-Key, ComponentLink9URL=https://datasheet.ciiva.com/29645/sn74lv4051a-q1-29645694.pdf?src-supplier=Digi-Key, ComponentLink10Description=https://datasheet.ciiva.com/29645/sn74lv4051a-q1-29645695.pdf?src-supplier=Digi-Key, ComponentLink10URL=https://datasheet.ciiva.com/29645/sn74lv4051a-q1-29645695.pdf?src-supplier=Digi-Key, Contact Plating=Gold, Lead Free="Lead Free", Logic Function=Multiplexer,Demultiplexer, Low Level Output Current=25mA, Mount="Surface Mount", Number of Bits=8, Number of Channels=1, Number of Circuits=1, Number of Inputs=8, Number of Outputs=1, Number of Pins=16, Packaging="Tape and Reel", Pricing 1="1=0.72000, 10=0.63600, 100=0.48730, 500=0.38522, 1000=0.30818 (USD)", Propagation Delay=7ns, Radiation Hardening=No, REACH SVHC="No SVHC", RoHS=Yes, Stock 1=2492, Supplier 1=Digi-Key, Supply Type=Single, Turn-Off Delay Time=20ns, Turn-On Delay Time=20ns, Weight=0.002169oz

## Via types
v1: diameter 0.6, hole 0.381, Top Layer to Bottom Layer, tented top, 138 vias

## Nets (pads, with @x,y where several pads share a name; then routed paths per layer and width w, separated by ;. In a path a pad name is that pad's centre, name@x,y a point inside that pad or via, vN(x,y) a via of type N, cw(c..) or ccw(c..) an arc to the next point about the centre after c; other vN are vias at no path point)
+3.3V_AN: C1_Mux1.2 C1_Mux2.2 C2_Mux1.2 C2_Mux2.2 C3_Mux1.2 C3_Mux2.2 C4_Mux1.2 C4_Mux2.2 C5_Mux1.2 C5_Mux2.2 C6_Mux1.2 C6_Mux2.2 Power_IN.1 Power_TP_1.1 Power_TP_2.1 Power_TP_3.1 R1.2 R2_Mux1.2 R2_Mux2.2 R3_Mux1.2 R3_Mux2.2 R4_Mux1.2 R4_Mux2.2 U1_Mux1.16 U1_Mux2.16 U2_Mux1.16 U2_Mux2.16 U3_Mux1.16 U3_Mux2.16 | length 205.6
  Top Layer w0.635: Power_IN.1 96.926,76.937 99.263,76.937 Power_TP_1.1
  Top Layer w1: U1_Mux2.16@34.939,69.686 C2_Mux2.2 35.371,73.99 48.717,73.99 49.479,73.228 ; U3_Mux2.16 35.027,39.384 C6_Mux2.2 49.047,39.472 ; U2_Mux2.16 35.027,56.91 C4_Mux2.2 49.047,56.921 ; R4_Mux2.2 48.324,22.645 49.047,23.368 49.047,33.553 ; Power_TP_2.1 49.581,73.228 49.479,73.228 ; Power_TP_3.1 49.2,33.706 49.047,33.553 ; U3_Mux1.16 63.095,69.721 62.967,69.85 ; R3_Mux1.2 67.361,69.826 67.285,69.903 ; U2_Mux1.16 79.123,68.047 79.123,69.903 ; R2_Mux1.2 83.388,69.926 ; R1.2 93.104,74.803 Power_IN.1 ; 94.615,69.926 83.388,69.926 ; U1_Mux1.16 94.818,64.819 Power_IN.1@94.818,74.803 ; 49.047,33.553 49.047,39.472 ; 49.047,39.472 49.047,56.921 ; 49.047,56.921 49.047,68.682 51.422,71.056 51.422,71.285 ; 49.479,73.228 51.422,71.285 ; 51.422,71.285 52.857,69.85 62.967,69.85 ; 62.967,69.85 63.019,69.903 67.285,69.903 ; 67.285,69.903 79.123,69.903 ; 79.123,69.903 79.146,69.926 83.388,69.926
ADC_OUTA1: ADC_Input_Therm_Volt_Connector.5 Interboard_ADC_Input_Con.10 R2_Mux1.1 U1_Mux1.3 | length 42.8
  Top Layer w0.508: 70.802,48.222 71.209,48.222
  Top Layer w0.75: Interboard_ADC_Input_Con.10 70.802,48.222 75.032,52.451 79.832,52.451 83.388,56.007 R2_Mux1.1 83.503,62.23 U1_Mux1.3 ; 71.209,48.222 77.394,42.037 ADC_Input_Therm_Volt_Connector.5
ADC_OUTA2: ADC_Input_Therm_Volt_Connector.3 Interboard_ADC_Input_Con.12 R2_Mux2.1 U1_Mux2.3 | length 60.5
  Top Layer w0.635: R2_Mux2.1 v1(45.034,58.496) ; v1(52.603,49.327) 52.603,49.276 57.099,44.78 69.901,44.78 Interboard_ADC_Input_Con.12 73.762,40.919 v1(73.812,40.919) ; v1(75.768,38.862) 76.53,38.1 ADC_Input_Therm_Volt_Connector.3@83.16,38.1
  Top Layer w0.75: R2_Mux2.1 U1_Mux2.3
  Bottom Layer w0.508: v1(73.812,40.919) 73.812,40.869 76.606,38.075 79.223,38.075
  Bottom Layer w0.653: v1@45.034,58.395 45.034,56.972 v1@52.654,49.352
ADC_OUTB1: ADC_Input_Therm_Volt_Connector.6 Interboard_ADC_Input_Con.7 R3_Mux1.1 U2_Mux1.3 | length 39.8
  Top Layer w0.635: v1(73.609,48.285) 77.851,44.044 ADC_Input_Therm_Volt_Connector.6
  Top Layer w0.75: Interboard_ADC_Input_Con.7@66.091,45.974 Interboard_ADC_Input_Con.7 66.091,54.305 67.363,55.577 67.363,62.23 U2_Mux1.3
  Bottom Layer w0.508: 79.35,44.044 79.591,44.044
  Bottom Layer w0.75: Interboard_ADC_Input_Con.7 68.402,48.362 v1@73.609,48.362
ADC_OUTB2: ADC_Input_Therm_Volt_Connector.4 Interboard_ADC_Input_Con.11 R3_Mux2.1 U2_Mux2.3 | length 59.4
  Top Layer w0.254: R3_Mux2.1@37.567,41.465 R3_Mux2.1
  Top Layer w0.75: R3_Mux2.1@37.567,41.465 U2_Mux2.3 ; R3_Mux2.1 v1@46.939,41.439 ; v1(67.285,37.567) 73.127,37.567 75.209,39.649 75.209,40.246 ; Interboard_ADC_Input_Con.11 71.171,45.136 75.209,41.097 75.209,40.246 ; 75.184,40.246 75.209,40.246 ; ADC_Input_Therm_Volt_Connector.4 75.425,40.03 75.209,40.246
  Bottom Layer w0.75: v1(46.939,41.402) 55.474,41.402 59.309,37.567 v1(67.285,37.567)
ADC_OUTC1: ADC_Input_Therm_Volt_Connector.2 Interboard_ADC_Input_Con.9 R4_Mux1.1 U3_Mux1.3 | length 57.4
  Top Layer w0.508: U3_Mux1.3@53.77,62.205 U3_Mux1.3 ; 68.58,41.021 68.631,41.072 ; v1(72.746,38.735) v1@72.796,38.735 ; v1(74.32,37.186) 75.489,36.017 ADC_Input_Therm_Volt_Connector.2
  Top Layer w0.75: U3_Mux1.3@53.77,62.205 50.851,62.205 50.851,48.235 58.064,41.021 68.58,41.021 70.51,41.021 v1@72.796,38.735 ; 68.631,41.072 Interboard_ADC_Input_Con.9
  Bottom Layer w0.381: v1(72.746,38.735) 72.771,38.735 v1(74.32,37.186) v1@74.346,37.186
ADC_OUTC2: ADC_Input_Therm_Volt_Connector.1 Interboard_ADC_Input_Con.8 R4_Mux2.1 U3_Mux2.3 | length 63.9
  Top Layer w0.381: U3_Mux2.3@37.541,26.77 U3_Mux2.3 ; v1@46.902,24.345 v1(46.914,24.333) ; v1@74.32,33.909 83.541,33.909 ADC_Input_Therm_Volt_Connector.1
  Top Layer w0.75: U3_Mux2.3@37.541,26.77 R4_Mux2.1 v1@46.902,24.345
  Bottom Layer w0.508: v1@74.32,33.884 v1(74.32,33.934)
  Bottom Layer w0.75: v1(46.914,24.333) 58.42,35.839 71.323,35.839 72.923,35.839 74.32,34.442 v1(74.32,33.934) ; Interboard_ADC_Input_Con.8 71.323,38.278 71.323,36.322
AGND: C1_Mux1.1 C1_Mux2.1 C2_Mux1.1 C2_Mux2.1 C3_Mux1.1 C3_Mux2.1 C4_Mux1.1 C4_Mux2.1 C5_Mux1.1 C5_Mux2.1 C6_Mux1.1 C6_Mux2.1 D1.1 Power_IN.2 S1.S1 S2.S3 S3.S2 S4.S4 U1_Mux1.6 U1_Mux1.7 U1_Mux1.8 U1_Mux2.6 U1_Mux2.7 U1_Mux2.8 U2_Mux1.6 U2_Mux1.7 U2_Mux1.8 U2_Mux2.6 U2_Mux2.7 U2_Mux2.8 U3_Mux1.6 U3_Mux1.7 U3_Mux1.8 U3_Mux2.6 U3_Mux2.7 U3_Mux2.8 | length 33.2
  Top Layer w0.508: U2_Mux2.7 U2_Mux2.7@42.697,44.194
  Top Layer w1: v1(32.207,38.71) 32.22,38.722 33.579,38.722 ; v1@32.283,72.746 33.643,72.746 ; v1@32.309,56.21 33.668,56.21 ; U3_Mux2.6 U3_Mux2.7 U3_Mux2.8 v1@45.163,26.795 ; U2_Mux2.6 U2_Mux2.7 U2_Mux2.8 v1@45.163,44.143 ; U1_Mux2.6 U1_Mux2.7 U1_Mux2.8 v1@45.163,60.298 ; v1@53.795,54.634 U3_Mux1.8 U3_Mux1.7 U3_Mux1.6 ; 64.579,67.056 v1@65.938,67.056 ; v1@69.823,54.634 U2_Mux1.8 U2_Mux1.7 U2_Mux1.6 ; 80.581,67.361 v1@81.94,67.361 ; v1(85.446,54.61) 85.469,54.634 U1_Mux1.8 U1_Mux1.7 U1_Mux1.6 ; D1.1 v1(93.726,77.902) ; 96.253,66.98 v1@97.612,66.98
  other v1: 45.187,26.772 45.187,44.12 53.772,54.61 69.799,54.61 32.296,56.198 45.187,60.274 97.625,66.992 65.951,67.068 81.953,67.373 32.271,72.733
NetD1_2: D1.2 R1.1 | length 1.5
  Top Layer w0.889: D1.2 91.529,76.238 R1.1
S0_U_Single_Mux1: U1_Mux1.11 U2_Mux1.11 U3_Mux1.11 | length 67.5
  Top Layer w0.508: v1(40.462,77.953) 40.513,78.003 41.377,78.003 ; v1(57.988,58.42) U3_Mux1.11 65.786,58.42 v1(65.862,58.496) ; v1(73.177,58.42) U2_Mux1.11 v1(81.356,58.42) ; v1(88.646,58.42) U1_Mux1.11
  Bottom Layer w0.4: v1(40.462,77.953) 45.517,77.953 48.285,75.184 48.285,68.123 v1(57.988,58.42) ; v1(65.862,58.496) 73.101,58.496 v1(73.177,58.42)
  Bottom Layer w0.508: v1(81.356,58.42) v1(88.646,58.42)
S0_U_Single_Mux2: MUX_SEL_CON.3 MUX_SEL_TP.3 U1_Mux2.11 U2_Mux2.11 U3_Mux2.11 | length 57.4
  Top Layer w0.4: MUX_SEL_TP.3 29.032,80.594 29.718,79.908 MUX_SEL_CON.3@41.148,79.908 ; 41.377,37.821 v1(41.377,38.252) ; v1(41.377,46.126) U2_Mux2.11 v1(41.377,55.169) ; v1(41.377,67.081) U1_Mux2.11 v1(41.377,71.399)
  Top Layer w0.5: v1(41.377,75.133) MUX_SEL_CON.3@41.377,79.781
  Top Layer w0.508: U3_Mux2.11 41.377,37.821
  Bottom Layer w0.4: v1(41.377,38.252) v1(41.377,46.126) ; v1(41.377,55.169) v1(41.377,67.081) ; v1(41.377,71.399) 41.427,71.45 41.351,71.526 41.351,75.006 v1@41.478,75.133
S1_U_Single_Mux1: U1_Mux1.10 U2_Mux1.10 U3_Mux1.10 | length 67.5
  Top Layer w0.508: 42.888,79.896 42.888,76.733 v1@43.891,76.733 ; v1(57.988,57.15) U3_Mux1.10 65.786,57.15 v1(65.862,57.226) ; v1(73.177,57.15) U2_Mux1.10 v1(81.356,57.15) ; v1(88.646,57.15) U1_Mux1.10
  Bottom Layer w0.4: v1@43.891,76.733 45.72,76.733 47.523,74.93 47.523,67.615 v1(57.988,57.15) ; v1(65.862,57.226) 73.101,57.226 v1(73.177,57.15)
  Bottom Layer w0.508: v1(81.356,57.15) v1(88.646,57.15)
  other v1: 43.967,76.733
S1_U_Single_Mux2: MUX_SEL_CON.2 MUX_SEL_TP.2 U1_Mux2.10 U2_Mux2.10 U3_Mux2.10 | length 56.4
  Top Layer w0.4: MUX_SEL_TP.2 31.572,81.077 32.029,80.62 40.411,80.62 40.742,80.95 41.935,80.95 42.647,80.239 42.647,80.137 MUX_SEL_CON.2@42.697,80.086 ; 42.647,37.821 v1(42.647,38.252) ; v1(42.647,46.126) U2_Mux2.10 v1(42.647,55.169) ; v1(42.647,67.081) U1_Mux2.10 v1(42.647,71.399) ; MUX_SEL_CON.2@42.672,79.604 MUX_SEL_CON.2@42.862,79.794
  Top Layer w0.5: v1(42.672,75.133) MUX_SEL_CON.2@42.672,79.604
  Top Layer w0.508: U3_Mux2.10 42.647,37.821
  Bottom Layer w0.4: v1(42.647,38.252) v1(42.647,46.126) ; v1(42.647,55.169) v1(42.647,67.081) ; v1(42.647,71.399) 42.647,75.082 v1@42.697,75.133
S2_U_Single_Mux1: U1_Mux1.9 U2_Mux1.9 U3_Mux1.9 | length 67.8
  Top Layer w0.508: 43.891,79.654 45.568,79.654 45.872,79.35 45.872,75.514 v1(45.491,75.133) ; v1(57.988,55.88) U3_Mux1.9 65.786,55.88 v1(65.862,55.956) ; v1(73.177,55.88) U2_Mux1.9 v1(81.356,55.88) ; v1(88.646,55.88) U1_Mux1.9
  Bottom Layer w0.4: v1(45.491,75.133) 45.491,68.377 v1(57.988,55.88) ; v1(65.862,55.956) 73.101,55.956 v1(73.177,55.88)
  Bottom Layer w0.508: v1(81.356,55.88) v1(88.646,55.88)
S2_U_Single_Mux2: MUX_SEL_CON.1 MUX_SEL_TP.1 U1_Mux2.9 U2_Mux2.9 U3_Mux2.9 | length 56.5
  Top Layer w0.4: MUX_SEL_TP.1 v1(36.779,81.763) ; v1(41.478,81.788) 41.504,81.763 43.358,81.763 44.018,81.102 44.018,79.934 MUX_SEL_CON.1 ; 43.917,37.821 v1(43.917,38.252) ; v1(43.917,46.126) U2_Mux2.9 v1(43.917,55.169) ; v1(43.917,67.081) U1_Mux2.9 v1(43.917,71.399)
  Top Layer w0.508: U3_Mux2.9 43.917,37.821 ; v1(43.967,75.133) 44.933,76.098 44.933,79.629 44.221,79.629 MUX_SEL_CON.1
  Bottom Layer w0.4: v1(43.917,38.252) v1(43.917,46.126) ; v1(43.917,55.169) v1(43.917,67.081) ; v1(43.917,71.399) 43.917,75.082 v1(43.967,75.133)
  Bottom Layer w0.508: v1(36.779,81.763) 36.805,81.788 v1(41.478,81.788)
TS_IN1_U_AHK50H-ND_THERM_CONNECTOR1: P1_CONNECTOR2.1@73.66,79.68 U1_Mux1.13 | length 36
  Top Layer w0.4: P1_CONNECTOR2.1@73.66,79.68 86.792,79.68 90.195,76.276 90.195,75.54 v1(90.259,75.476) v1@90.322,75.413 ; v1@90.297,68.605 92.304,66.599 92.304,62.103 93.447,60.96 U1_Mux1.13
  Bottom Layer w0.508: v1@90.259,68.605 v1(90.259,75.476)
  other v1: 90.297,68.58
TS_IN1_U_AHK50H-ND_THERM_CONNECTOR2: P1_CONNECTOR2.1@20.676,59.411 U1_Mux2.13 | length 23.2
  Top Layer w0.4: P1_CONNECTOR2.1@20.676,59.411 20.828,59.411 22.428,61.011 v1(23.292,61.011) ; v1(25.857,61.087) 30.734,65.964 36.601,65.964 38.837,68.199 U1_Mux2.13
  Bottom Layer w0.508: v1(23.292,61.011) 25.781,61.011 v1(25.857,61.087)
TS_IN2_U_AHK50H-ND_THERM_CONNECTOR1: P1_CONNECTOR2.2@73.66,81.661 U1_Mux1.14 | length 37
  Top Layer w0.4: v1(91.821,68.58) 93.345,67.056 93.345,62.687 93.751,62.281 94.718,62.281 U1_Mux1.14
  Top Layer w0.508: P1_CONNECTOR2.2@73.66,81.661 87.706,81.661 v1(89.713,79.654)
  Bottom Layer w0.508: v1(89.713,79.654) 91.821,77.546 v1(91.821,68.58)
TS_IN2_U_AHK50H-ND_THERM_CONNECTOR2: P1_CONNECTOR2.2@18.694,59.411 U1_Mux2.14 | length 23.8
  Top Layer w0.4: P1_CONNECTOR2.2@18.694,59.411 21.438,62.154 v1(23.292,62.154) v1@23.343,62.154 ; v1@25.933,62.281 30.429,66.777 35.966,66.777 37.567,68.377 U1_Mux2.14
  Bottom Layer w0.508: v1@23.343,62.154 25.806,62.154 v1@25.933,62.281
  other v1: 25.857,62.281
TS_IN3_U_AHK50H-ND_THERM_CONNECTOR1: P1_CONNECTOR2.3@71.653,79.68 U1_Mux1.15 | length 41
  Top Layer w0.5: 85.446,77.749 85.979,77.749 87.63,76.098 87.63,75.006 90.729,71.907 v1(93.015,71.907)
  Top Layer w0.508: P1_CONNECTOR2.3@71.653,79.68 71.653,79.172 73.076,77.749 85.446,77.749 ; 96.545,63.5 99.187,66.142 v1(99.187,66.777)
  Top Layer w0.75: U1_Mux1.15 96.545,63.5
  Bottom Layer w0.508: v1(93.015,71.907) 95.809,71.907 99.187,68.529 v1(99.187,66.777)
TS_IN3_U_AHK50H-ND_THERM_CONNECTOR2: P1_CONNECTOR2.3@20.676,57.404 U1_Mux2.15 | length 22.6
  Top Layer w0.4: P1_CONNECTOR2.3@20.676,57.404 20.904,57.633 22.225,57.633 24.663,60.071 24.663,62.255 29.997,67.589 35.357,67.589 36.297,68.529 U1_Mux2.15
TS_IN4_U_AHK50H-ND_THERM_CONNECTOR1: P1_CONNECTOR2.4@71.653,81.661 U1_Mux1.12 | length 40.3
  Top Layer w0.4: P1_CONNECTOR2.4@71.653,81.661 72.669,80.645 72.669,79.223 73.304,78.588 86.563,78.588 89.23,75.921 v1(89.23,75.438) ; v1(89.23,68.58) 91.237,66.573 91.237,61.341 92.888,59.69 U1_Mux1.12
  Bottom Layer w0.508: v1@89.23,68.732 v1(89.23,75.438)
TS_IN4_U_AHK50H-ND_THERM_CONNECTOR2: P1_CONNECTOR2.4@18.694,57.404 U1_Mux2.12 | length 27.6
  Top Layer w0.4: P1_CONNECTOR2.4@18.694,57.404 18.872,57.404 19.888,58.42 21.615,58.42 23.114,59.919 v1@23.241,59.919 ; v1@25.756,59.893 30.861,64.999 37.389,64.999 40.107,67.716 U1_Mux2.12
  Bottom Layer w0.508: v1@23.241,59.919 v1(23.292,59.919) 25.73,59.919 v1@25.756,59.893
  other v1: 25.857,59.893
TS_IN5_U_AHK50H-ND_THERM_CONNECTOR1: P1_CONNECTOR2.5@69.647,79.68 U1_Mux1.1 | length 28.5
  Top Layer w0.508: P1_CONNECTOR2.5@69.647,79.68 72.39,76.937 84.455,76.937 85.319,76.073 v1(85.319,71.806)
  Top Layer w1: v1(85.446,67.589) 85.446,64.794 U1_Mux1.1
  Bottom Layer w0.508: v1(85.319,71.806) 85.319,67.716 v1(85.446,67.589)
TS_IN5_U_AHK50H-ND_THERM_CONNECTOR2: P1_CONNECTOR2.5@20.676,55.397 U1_Mux2.1 | length 16.4
  Top Layer w0.508: P1_CONNECTOR2.5@20.676,55.397 29.515,55.397 34.415,60.298 U1_Mux2.1
TS_IN6_U_AHK50H-ND_THERM_CONNECTOR1: P1_CONNECTOR2.6@69.647,81.661 U1_Mux1.5 | length 41.7
  Top Layer w0.4: v1(68.682,78.308) 68.682,80.493 68.656,80.518 69.647,81.509 P1_CONNECTOR2.6@69.647,81.661 ; U1_Mux1.5 86.893,59.69 89.281,62.078 89.281,67.361 v1@88.24,68.402
  Bottom Layer w0.508: v1(68.682,78.308) 70.129,76.86 79.477,76.86 81.559,74.778 86.741,74.778 88.24,73.279 v1(88.24,68.58)
TS_IN6_U_AHK50H-ND_THERM_CONNECTOR2: P1_CONNECTOR2.6@18.694,55.397 U1_Mux2.5 | length 27.7
  Top Layer w0.4: P1_CONNECTOR2.6@18.694,55.397 19.736,56.439 21.996,56.439 23.622,58.064 26.365,58.064 32.436,64.135 38.049,64.135 40.107,62.078 U1_Mux2.5
TS_IN7_U_AHK50H-ND_THERM_CONNECTOR1: P1_CONNECTOR2.7@67.64,79.68 U1_Mux1.2 | length 35.3
  Top Layer w0.4: P1_CONNECTOR2.7@67.64,79.68 67.64,78.003 69.875,75.768 v1(83.617,75.768) ; U1_Mux1.2 85.52,63.449 86.639,63.449 87.325,64.135 87.325,67.081 86.36,68.047 v1@86.36,68.351 ; v1(86.182,75.819) 86.335,75.667 86.335,71.882 86.36,71.857 v1(86.36,71.755)
  Bottom Layer w0.508: v1(83.617,75.768) v1@86.182,75.768 ; v1(86.284,68.58) 86.284,71.679 v1(86.36,71.755)
TS_IN7_U_AHK50H-ND_THERM_CONNECTOR2: P1_CONNECTOR2.7@20.676,53.391 U1_Mux2.2 | length 22.5
  Top Layer w0.508: P1_CONNECTOR2.7@20.676,53.391 22.758,53.391 v1(22.809,53.34) ; v1(23.241,56.21) 23.495,56.464 28.778,56.464 34.544,62.23 36.017,62.23 36.297,61.951 U1_Mux2.2
  Bottom Layer w0.508: v1(22.809,53.34) 22.809,55.778 v1(23.241,56.21)
TS_IN8_U_AHK50H-ND_THERM_CONNECTOR1: P1_CONNECTOR2.8@67.64,81.661 U1_Mux1.4 | length 41.1
  Top Layer w0.4: P1_CONNECTOR2.8@67.64,81.661 67.64,81.382 66.675,80.416 66.675,77.826 69.621,74.879 81.839,74.879 v1(83.236,73.482) ; U1_Mux1.4 85.52,60.909 86.792,60.909 88.214,62.332 88.214,67.259 87.249,68.224 v1@87.249,68.428
  Bottom Layer w0.508: v1(83.236,73.482) 86.792,73.482 87.3,72.974 87.3,68.631 v1(87.249,68.58)
TS_IN8_U_AHK50H-ND_THERM_CONNECTOR2: P1_CONNECTOR2.8@18.694,53.391 U1_Mux2.4 | length 27.3
  Top Layer w0.4: P1_CONNECTOR2.8@18.694,53.391 19.66,54.356 v1(24.46,54.356) ; v1(25.578,57.302) 27.508,57.302 33.274,63.068 37.617,63.068 38.837,61.849 U1_Mux2.4
  Bottom Layer w0.508: v1(24.46,54.356) 24.46,56.185 24.562,56.286 v1(25.578,57.302)
TS_IN9_U_AHK50H-ND_THERM_CONNECTOR1: P1_CONNECTOR2.9@65.634,79.68 U2_Mux1.13 | length 28.3
  Top Layer w0.4: P1_CONNECTOR2.9@65.634,79.68 65.634,77.368 v1(67.843,75.159) ; v1@75.514,68.707 75.514,63.373 77.876,61.011 79.072,61.011 U2_Mux1.13
  Bottom Layer w0.508: v1(67.843,75.159) 73.685,75.159 75.59,73.254 v1@75.59,68.885
  other v1: 75.514,68.732
TS_IN9_U_AHK50H-ND_THERM_CONNECTOR2: P1_CONNECTOR2.9@20.676,51.384 U2_Mux2.13 | length 20.6
  Top Layer w0.4: P1_CONNECTOR2.9@20.676,51.384 20.879,51.181 v1(30.277,51.181)
  Top Layer w0.508: v1(38.837,51.41) U2_Mux2.13
  Bottom Layer w0.4: v1(30.277,51.181) 30.531,50.927 38.354,50.927 v1(38.837,51.41)
TS_IN10_U_AHK50H-ND_THERM_CONNECTOR1: P1_CONNECTOR2.10@65.634,81.661 U2_Mux1.14 | length 31.9
  Top Layer w0.4: P1_CONNECTOR2.10@65.634,81.661 64.668,80.696 64.668,76.886 67.716,73.838 v1(76.556,73.838) ; v1(76.606,68.732) 76.606,63.271 77.648,62.23 U2_Mux1.14
  Bottom Layer w0.508: v1(76.556,73.838) 76.556,68.783 v1(76.606,68.732)
TS_IN10_U_AHK50H-ND_THERM_CONNECTOR2: P1_CONNECTOR2.10@18.694,51.384 U2_Mux2.14 | length 21.3
  Top Layer w0.4: P1_CONNECTOR2.10@18.694,51.384 19.66,52.349 30.124,52.349 v1@30.378,52.095 ; U2_Mux2.14 37.592,53.418 v1(37.592,51.714)
  Bottom Layer w0.4: v1@30.378,52.095 31.013,52.095 31.394,51.714 v1(37.592,51.714)
  other v1: 30.277,52.095
TS_IN11_U_AHK50H-ND_THERM_CONNECTOR1: P1_CONNECTOR2.11@63.627,79.68 U2_Mux1.15 | length 29.6
  Top Layer w0.4: P1_CONNECTOR2.11@63.627,79.68 63.627,76.302 66.853,73.076 v1(77.673,73.076) ; v1@77.699,68.707 77.724,68.682 77.724,63.805 78.003,63.525 79.097,63.525 U2_Mux1.15
  Bottom Layer w0.508: v1(77.673,73.076) 77.673,68.732 v1@77.699,68.707
  other v1: 77.699,68.732
TS_IN11_U_AHK50H-ND_THERM_CONNECTOR2: P1_CONNECTOR2.11@20.676,49.378 U2_Mux2.15 | length 19
  Top Layer w0.508: P1_CONNECTOR2.11@20.676,49.378 35.128,49.378 36.297,50.546 U2_Mux2.15
TS_IN12_U_AHK50H-ND_THERM_CONNECTOR1: P1_CONNECTOR2.12@63.627,81.661 U2_Mux1.12 | length 34.1
  Top Layer w0.4: P1_CONNECTOR2.12@63.627,81.661 62.738,80.772 62.738,75.514 67.031,71.222 v1(74.447,71.272) ; 74.397,68.453 74.397,63.017 77.724,59.69 U2_Mux1.12
  Bottom Layer w0.508: v1@74.447,68.732 v1(74.447,71.272)
  other v1: 74.447,68.758
TS_IN12_U_AHK50H-ND_THERM_CONNECTOR2: P1_CONNECTOR2.12@18.694,49.378 U2_Mux2.12 | length 25.1
  Top Layer w0.4: P1_CONNECTOR2.12@18.694,49.378 19.71,50.394 30.124,50.394 v1(30.277,50.241)
  Top Layer w0.508: U2_Mux2.12 40.132,53.418 v1(40.132,50.241)
  Bottom Layer w0.4: v1(30.277,50.241) v1(40.132,50.241)
TS_IN13_U_AHK50H-ND_THERM_CONNECTOR1: P1_CONNECTOR2.13@61.62,79.705 U2_Mux1.1 | length 22.1
  Top Layer w0.4: v1@61.62,72.746 P1_CONNECTOR2.13@61.62,79.705 ; v1(69.748,66.573) 69.823,66.499 U2_Mux1.1
  Bottom Layer w0.508: v1(61.595,72.746) 62.713,71.628 69.012,71.628 69.748,70.891 v1(69.748,66.573) v1@69.799,66.523
TS_IN13_U_AHK50H-ND_THERM_CONNECTOR2: P1_CONNECTOR2.13@20.65,47.371 U2_Mux2.1 | length 15.7
  Top Layer w0.508: P1_CONNECTOR2.13@20.65,47.371 30.328,47.371 33.579,44.12 35.003,44.12 U2_Mux2.1
TS_IN14_U_AHK50H-ND_THERM_CONNECTOR1: P1_CONNECTOR2.14@61.62,81.686 U2_Mux1.5 | length 36.3
  Top Layer w0.4: v1(60.63,76.479) 60.63,80.62 61.62,81.61 P1_CONNECTOR2.14@61.62,81.686 ; U2_Mux1.5 69.848,59.715 v1(73.584,59.715)
  Bottom Layer w0.508: v1(60.63,76.479) 61.798,76.479 62.027,76.251 63.957,74.32 70.942,74.32 73.609,71.653 73.609,59.741 v1(73.584,59.715)
TS_IN14_U_AHK50H-ND_THERM_CONNECTOR2: P1_CONNECTOR2.14@18.669,47.371 U2_Mux2.5 | length 24.7
  Top Layer w0.508: P1_CONNECTOR2.14@18.669,47.371 19.685,48.387 37.795,48.387 40.107,46.076 U2_Mux2.5
TS_IN15_U_AHK50H-ND_THERM_CONNECTOR1: P1_CONNECTOR2.15@59.614,79.705 U2_Mux1.2 | length 26.9
  Top Layer w0.4: v1(59.614,74.295) 59.614,74.6 P1_CONNECTOR2.15@59.614,79.705 ; U2_Mux1.2 70.536,63.5 71.145,64.11 71.145,66.497 v1(70.968,66.675)
  Bottom Layer w0.508: v1(59.614,74.295) 61.417,74.295 61.62,74.092 63.322,72.39 70.002,72.39 70.968,71.425 v1(70.968,66.675)
TS_IN15_U_AHK50H-ND_THERM_CONNECTOR2: P1_CONNECTOR2.15@20.65,45.364 U2_Mux2.2 | length 17.8
  Top Layer w0.508: P1_CONNECTOR2.15@20.65,45.364 20.726,45.288 v1@29.87,45.288 ; v1(32.791,46.279) 35.585,46.279 36.297,45.568 U2_Mux2.2
  Bottom Layer w0.508: v1@29.87,45.288 v1(29.997,45.288) 31.801,45.288 v1(32.791,46.279)
TS_IN16_U_AHK50H-ND_THERM_CONNECTOR1: P1_CONNECTOR2.16@59.614,81.686 U2_Mux1.4 | length 34.7
  Top Layer w0.4: v1(58.661,78.092) 58.649,78.105 58.649,80.34 59.614,81.305 P1_CONNECTOR2.16@59.614,81.686 ; U2_Mux1.4 v1(72.238,60.96)
  Bottom Layer w0.508: v1(58.661,78.092) 58.661,76.391 59.131,75.921 59.792,75.26 61.747,75.26 63.576,73.431 70.333,73.431 72.72,71.044 72.72,61.443 v1(72.238,60.96)
TS_IN16_U_AHK50H-ND_THERM_CONNECTOR2: P1_CONNECTOR2.16@18.669,45.364 U2_Mux2.4 | length 23.2
  Top Layer w0.508: P1_CONNECTOR2.16@18.669,45.364 19.685,46.38 v1(29.997,46.38) ; v1(32.791,47.269) 37.262,47.269 38.837,45.695 U2_Mux2.4
  Bottom Layer w0.508: v1(29.997,46.38) 31.115,46.38 32.004,47.269 v1(32.791,47.269)
TS_IN17_U_AHK50H-ND_THERM_CONNECTOR1: P1_CONNECTOR2.17@57.607,79.68 U3_Mux1.13 | length 21.8
  Top Layer w0.4: P1_CONNECTOR2.17@57.607,79.68 57.607,74.295 v1@57.683,74.219 ; v1@58.699,68.555 58.699,63.932 61.697,60.935 63.07,60.935 U3_Mux1.13
  Bottom Layer w0.508: v1@57.683,74.219 57.683,72.847 58.699,71.831 v1@58.699,68.555
  other v1: 58.699,68.504 57.683,74.295
TS_IN17_U_AHK50H-ND_THERM_CONNECTOR2: P1_CONNECTOR2.17@20.676,43.358 U3_Mux2.13 | length 28.3
  Top Layer w0.508: P1_CONNECTOR2.17@20.676,43.358 v1(21.971,43.358) ; v1@21.92,40.361 21.946,40.335 21.946,40.157 29.82,32.283 37.211,32.283 38.837,33.909 U3_Mux2.13
  Bottom Layer w0.508: v1@21.92,40.361 21.92,40.183 v1@21.971,40.132 ; v1(21.971,43.358) v1(21.971,40.361) v1@21.971,40.132 ; 22.2,39.903 v1@21.971,40.132
TS_IN18_U_AHK50H-ND_THERM_CONNECTOR1: P1_CONNECTOR2.18@57.607,81.661 U3_Mux1.14 | length 24.3
  Top Layer w0.4: P1_CONNECTOR2.18@57.607,81.661 56.667,80.721 56.667,74.016 57.48,73.203 v1(59.563,73.203) ; v1@59.995,68.555 59.995,64.338 62.103,62.23 U3_Mux1.14
  Bottom Layer w0.508: v1(59.563,73.203) 59.995,72.771 v1@59.995,68.555
  other v1: 59.995,68.504
TS_IN18_U_AHK50H-ND_THERM_CONNECTOR2: P1_CONNECTOR2.18@18.694,43.358 U3_Mux2.14 | length 26.6
  Top Layer w0.508: P1_CONNECTOR2.18@18.694,43.358 19.685,42.367 23.216,42.367 23.292,42.291 v1(23.292,42.393) ; v1(23.266,40.361) 30.251,33.376 36.728,33.376 37.567,34.214 U3_Mux2.14
  Bottom Layer w0.508: v1(23.266,40.361) 23.266,40.462 23.292,40.488 v1(23.292,42.393)
TS_IN19_U_AHK50H-ND_THERM_CONNECTOR1: P1_CONNECTOR2.19@55.601,79.68 U3_Mux1.15 | length 22.6
  Top Layer w0.4: P1_CONNECTOR2.19@55.601,79.68 55.601,71.476 56.083,70.993 v1(61.011,70.993) ; v1@61.087,68.478 61.163,68.402 61.163,64.618 62.281,63.5 U3_Mux1.15
  Bottom Layer w0.508: v1(61.011,70.993) 61.011,68.555 v1@61.087,68.478
  other v1: 61.087,68.504
TS_IN19_U_AHK50H-ND_THERM_CONNECTOR2: P1_CONNECTOR2.19@20.676,41.351 U3_Mux2.15 | length 20
  Top Layer w0.508: P1_CONNECTOR2.19@20.676,41.351 24.079,41.351 30.836,34.595 v1(32.995,34.595) ; U3_Mux2.15 36.271,36.07 36.322,36.019 v1(36.322,34.595)
  Bottom Layer w0.508: v1(32.995,34.595) v1(36.322,34.595) v1@36.297,34.569
TS_IN20_U_AHK50H-ND_THERM_CONNECTOR1: P1_CONNECTOR2.20@55.601,81.661 U3_Mux1.12 | length 27.1